# EAGLE board CT_schematic (EAGLE 7.6.0)

Size 100 x 80 mm. Coordinates in mm from the lower left corner, seen from the top.
Outline: 0,0 100,0 100,80 0,80 0,0
Copper layers (1*16): Top 0.035mm / dielectric 1.5mm / Bottom 0.035mm
Design rules "default": minimum track width 10mil, minimum drill 24mil, track to track 8mil, track to pad 8mil, pad to pad 8mil, via to via 8mil, smd to smd 8mil, copper to edge 40mil, drill to drill 8mil, minimum pad ring 10mil, minimum via ring 8mil, stop-mask expansion 4mil, vias tented up to drill 0mil, thermal gap 10mil

## Footprints (pad centres in the part's own frame; a part is rotated, then mirrored left to right if it is on the bottom)
C0603 = smd 0.8 x 0.8: 1 -0.762,0; 2 0.762,0
C0402 = smd 0.5 x 0.5: 1 -0.508,0; 2 0.508,0
C0805 = smd 1.2 x 1.3: 1 -1.016,0; 2 1.016,0
C1210 = smd 1.2 x 2.5: 1 -1.524,0; 2 1.524,0
2220 = smd 1.85 x 5.5: 1 -2.55,0; 2 2.55,0
R0603 = smd 0.8 x 0.8: 1 -0.762,0; 2 0.762,0
EXV-9H = smd 3.505 x 1.676: 1 -2.857,0; 2 2.857,0
L0603 = smd 0.8 x 0.8: 1 -0.762,0; 2 0.762,0
WE-HCI_7030/7040/7050 = smd 2.5 x 3: 1 -2.45,0; 2 2.45,0
PJ-037B_PACKAGE = drill 3.7 square: 1 12,0 | drill 3.2 square: 2 6,0
TFBGA100 = smd 0.4 x 0.4: A1 -3.6,3.6; A2 -2.8,3.6; A3 -2,3.6; A4 -1.2,3.6; A5 -0.4,3.6; A6 0.4,3.6; A7 1.2,3.6; A8 2,3.6; A9 2.8,3.6; A10 3.6,3.6; B1 -3.6,2.8; B2 -2.8,2.8; B3 -2,2.8; B4 -1.2,2.8; B5 -0.4,2.8; B6 0.4,2.8; B7 1.2,2.8; B8 2,2.8; B9 2.8,2.8; B10 3.6,2.8; C1 -3.6,2; C2 -2.8,2; C3 -2,2; C4 -1.2,2; C5 -0.4,2; C6 0.4,2; C7 1.2,2; C8 2,2; C9 2.8,2; C10 3.6,2; D1 -3.6,1.2; D2 -2.8,1.2; D3 -2,1.2; D4 -1.2,1.2; D5 -0.4,1.2; D6 0.4,1.2; D7 1.2,1.2; D8 2,1.2; D9 2.8,1.2; D10 3.6,1.2; E1 -3.6,0.4; E2 -2.8,0.4; E3 -2,0.4; E4 -1.2,0.4; E5 -0.4,0.4; E6 0.4,0.4; E7 1.2,0.4; E8 2,0.4; E9 2.8,0.4; E10 3.6,0.4; F1 -3.6,-0.4; F2 -2.8,-0.4; F3 -2,-0.4; F4 -1.2,-0.4; F5 -0.4,-0.4; F6 0.4,-0.4; F7 1.2,-0.4; F8 2,-0.4; F9 2.8,-0.4; F10 3.6,-0.4; G1 -3.6,-1.2; G2 -2.8,-1.2; G3 -2,-1.2; G4 -1.2,-1.2; G5 -0.4,-1.2; G6 0.4,-1.2; G7 1.2,-1.2; G8 2,-1.2; G9 2.8,-1.2; G10 3.6,-1.2; H1 -3.6,-2; H2 -2.8,-2; H3 -2,-2; H4 -1.2,-2; H5 -0.4,-2; H6 0.4,-2; H7 1.2,-2; H8 2,-2; H9 2.8,-2; H10 3.6,-2; J1 -3.6,-2.8; J2 -2.8,-2.8; J3 -2,-2.8; J4 -1.2,-2.8; J5 -0.4,-2.8; J6 0.4,-2.8; J7 1.2,-2.8; J8 2,-2.8; J9 2.8,-2.8; J10 3.6,-2.8; K1 -3.6,-3.6; K2 -2.8,-3.6; K3 -2,-3.6; K4 -1.2,-3.6; K5 -0.4,-3.6; K6 0.4,-3.6; K7 1.2,-3.6; K8 2,-3.6; K9 2.8,-3.6; K10 3.6,-3.6
SOT-23-6 = smd 1.1 x 0.6: 1 -1.4,0.95; 2 -1.4,0; 3 -1.4,-0.95; 4 1.4,-0.95; 5 1.4,0; 6 1.4,0.95
SAMTEC_FTSH-105-01-L-DV-K = smd 0.762 x 2.794: 1 -2.54,-2.032; 2 -2.54,2.032; 3 -1.27,-2.032; 4 -1.27,2.032; 5 0,-2.032; 6 0,2.032; 7 1.27,-2.032; 8 1.27,2.032; 9 2.54,-2.032; 10 2.54,2.032
SOIC-8 = smd 1.6 x 0.6: 1 -2.7,1.905 | smd 1.55 x 0.6: 2 -2.7,0.635; 3 -2.7,-0.635; 4 -2.7,-1.905; 5 2.7,-1.905; 6 2.7,-0.635; 7 2.7,0.635; 8 2.7,1.905
182-009-MALE = drill 1.194 pad 1.524 octagon: 1 -5.537,10.923; 2 -2.769,10.923; 3 0,10.923; 4 2.769,10.923; 5 5.537,10.923; 6 -4.153,8.08; 7 -1.384,8.08; 8 1.384,8.08; 9 4.153,8.08 | hole 3.048: -12.446,9.501; 12.446,9.501
MOLEX_47219-2001 = smd 0.8 x 1.5: 1 3.2,-2.1; 2 2.1,-2.1; 3 1,-2.1; 4 -0.1,-2.1; 5 -1.2,-2.1; 6 -2.3,-2.1; 7 -3.4,-2.1; 8 -4.5,-2.1 | smd 1.5 x 2.05: G1 6.875,-4.7; G2 6.875,3.6; G3 -6.875,3.6; G4 -6.875,-4.7
MICRO_USB_AB = smd 0.4 x 1.35: 1 1.3,0.26; 2 0.65,0.26; 3 0,0.26; 4 -0.65,0.26; 5 -1.3,0.26 | drill 0.6 pad 0.95 long: 6 4.175,-2.54; 7 -4.175,-2.54 | drill 0.7 pad 1.1 long: 8 -2.225,0.46; 9 2.225,0.46
SOT143B = smd 1 x 0.7: 1 -0.75,-1 | smd 0.6 x 0.7: 2 0.95,-1; 3 0.95,1; 4 -0.95,1
ABS07-32.768KHZ-7-T = smd 1.1 x 2.4: 1 -2.5,0; 2 0,0
ABLS-25.000MHZ-B2F-T = smd 5.6 x 2.8: 1 -3.81,0; 2 5.69,0
WSON-8 = smd 0.3 x 0.6: 1 -0.75,0; 2 0.05,0; 3 0.85,0; 4 1.65,0; 5 1.65,3.8; 6 0.85,3.8; 7 0.05,3.8; 8 -0.75,3.8 | smd 3 x 2.6: PAD 0.45,1.9
QFN-16_EP = smd 0.805 x 0.3: 1 -1.452,0.75; 2 -1.452,0.25; 3 -1.452,-0.25; 4 -1.452,-0.75; 9 1.452,-0.75; 10 1.452,-0.25; 11 1.452,0.25; 12 1.452,0.75 | smd 0.3 x 0.805: 5 -0.75,-1.452; 6 -0.25,-1.452; 7 0.25,-1.452; 8 0.75,-1.452; 13 0.75,1.452; 14 0.25,1.452; 15 -0.25,1.452; 16 -0.75,1.452 | smd 1.55 x 1.55: 17 0,0
QFN-38_UHF = smd 0.75 x 0.3: 1 -2.4,2.75; 2 -2.4,2.25; 3 -2.4,1.75; 4 -2.4,1.25; 6 -2.4,0.25; 7 -2.4,-0.25; 8 -2.4,-0.75; 9 -2.4,-1.25; 10 -2.4,-1.75; 11 -2.4,-2.25; 12 -2.4,-2.75; 20 2.4,-2.75; 21 2.4,-2.25; 22 2.4,-1.75; 23 2.4,-1.25; 24 2.4,-0.75; 25 2.4,-0.25; 26 2.4,0.25; 27 2.4,0.75; 28 2.4,1.25; 29 2.4,1.75; 30 2.4,2.25; 31 2.4,2.75 | smd 0.758 x 0.3: 5 -2.4,0.75 | smd 0.3 x 0.75: 13 -1.5,-3.4; 14 -1,-3.4; 15 -0.5,-3.4; 16 0,-3.4; 17 0.5,-3.4; 18 1,-3.4; 19 1.5,-3.4; 32 1.5,3.4; 33 1,3.4; 34 0.5,3.4; 35 0,3.4; 36 -0.5,3.4; 37 -1,3.4; 38 -1.5,3.4 | smd 3.2 x 5.2: 39 0,0
IRF8306MTRPBF = smd 0.9 x 1.85: 1 0,0; 2 0,-2.35; 6 6.4,0; 7 6.4,-2.35 | smd 0.75 x 0.75: 3 1.75,-1.175 | smd 1.45 x 0.87: 4 3.5,-0.565; 5 3.5,-1.785
SW_4-1437565-2 = smd 1.4 x 2.1: 1 -2.23,4.55; 2 -2.23,-4.55; 3 2.23,4.55; 4 2.23,-4.55
LGM67K-G1J2-24-Z = smd 0.8 x 1.4: A -2,0; C 0,0
NC7SZ125M5X = smd 1.3 x 0.7: 1 -1.3,0.95; 2 -1.3,0; 3 -1.3,-0.95; 4 1.3,-0.95; 5 1.3,0.95
DUMMY_PACKAGE_257 = drill 0.3: 1 0,-1; 2 1.5,-1; 3 3,-1

## Placement (x,y rotation side)
C1  1e-06  [C0603]  -62.23,88.9 0 top  (outside the outline)
C2  1e-07  [C0603]  -66.04,88.9 0 top  (outside the outline)
C3  1e-07  [C0603]  -69.85,88.9 0 top  (outside the outline)
C4  1e-07  [C0603]  -73.66,88.9 0 top  (outside the outline)
C5  1e-07  [C0603]  -77.47,88.9 0 top  (outside the outline)
C6  1e-07  [C0603]  -81.28,88.9 0 top  (outside the outline)
C7  4.7e-06  [C0603]  -54.61,88.9 0 top  (outside the outline)
C8  1e-08  [C0603]  -85.09,88.9 0 top  (outside the outline)
C9  1e-06  [C0603]  -88.9,88.9 0 top  (outside the outline)
C10  1e-07  [C0603]  -15.24,93.98 0 top  (outside the outline)
C11  1e-07  [C0603]  -19.05,93.98 0 top  (outside the outline)
C12  1e-07  [C0603]  -22.86,93.98 0 top  (outside the outline)
C13  1e-11  [C0402]  -15.24,99.06 0 top  (outside the outline)
C14  1e-11  [C0402]  -19.05,99.06 0 top  (outside the outline)
C15  1e-11  [C0402]  -22.86,99.06 0 top  (outside the outline)
C16  1e-11  [C0402]  -26.67,99.06 0 top  (outside the outline)
C17  1e-07  [C0402]  -30.48,99.06 0 top  (outside the outline)
C18  1e-08  [C0402]  -34.29,99.06 0 top  (outside the outline)
C19  1e-06  [C0603]  -26.67,93.98 0 top  (outside the outline)
C20  1e-06  [C0603]  -30.48,93.98 0 top  (outside the outline)
C21  1e-07  [C0402]  -38.1,99.06 0 top  (outside the outline)
C22  1e-05  [C0805]  -90.17,71.12 0 top  (outside the outline)
C23  1e-08  [C0402]  -41.91,99.06 0 top  (outside the outline)
C24  1e-05  [C1210]  -48.26,72.39 0 top  (outside the outline)
C25  1e-05  [C0805]  -15.24,78.74 0 top  (outside the outline)
C26  1e-05  [C0805]  -20.32,78.74 0 top  (outside the outline)
C27  1e-06  [C0603]  -34.29,93.98 0 top  (outside the outline)
C28  1e-07  [C0402]  -45.72,99.06 0 top  (outside the outline)
C29  6.8e-05  [2220]  -31.75,54.61 0 top  (outside the outline)
C30  1e-08  [C0402]  -49.53,99.06 0 top  (outside the outline)
C31  1e-05  [C1210]  -54.61,72.39 0 top  (outside the outline)
C32  1e-05  [C1210]  -60.96,72.39 0 top  (outside the outline)
C33  1e-08  [C0402]  -53.34,99.06 0 top  (outside the outline)
C34  1e-05  [C1210]  -67.31,72.39 0 top  (outside the outline)
C35  1e-05  [C0805]  -25.4,78.74 0 top  (outside the outline)
C36  1e-07  [C0402]  -57.15,99.06 0 top  (outside the outline)
C37  2.2e-06  [C0603]  -58.42,88.9 0 top  (outside the outline)
C38  2.45e-08  [R0603]  -20.32,83.82 0 top  (outside the outline)
C39  2.8258362168397e-09  [R0603]  -35.56,78.74 0 top  (outside the outline)
C40  7.105e-09  [R0603]  -40.64,78.74 0 top  (outside the outline)
C41  0.0001  [EXV-9H]  -46.99,63.5 0 top  (outside the outline)
C42  0.0001  [EXV-9H]  -58.42,63.5 0 top  (outside the outline)
C43  1e-08  [C0402]  -60.96,99.06 0 top  (outside the outline)
C44  1e-08  [C0402]  -64.77,99.06 0 top  (outside the outline)
F1  240.0  [L0603]  -38.1,93.98 0 top  (outside the outline)
I1  3.3e-06  [WE-HCI_7030/7040/7050]  -17.78,43.18 0 top  (outside the outline)
J1  PJ-037B  [PJ-037B_PACKAGE]  -73.66,29.21 0 top  (outside the outline)
R2  1000.0  [R0603]  -41.91,93.98 0 top  (outside the outline)
R7  4700.0  [R0603]  -45.72,93.98 0 top  (outside the outline)
R8  2200.0  [R0603]  -49.53,93.98 0 top  (outside the outline)
R10  2200.0  [R0603]  -53.34,93.98 0 top  (outside the outline)
R12  47000.0  [R0603]  -25.4,83.82 0 top  (outside the outline)
R13  10000.0  [R0603]  -30.48,83.82 0 top  (outside the outline)
R14  10000.0  [R0603]  -35.56,83.82 0 top  (outside the outline)
R15  10000.0  [R0603]  -40.64,83.82 0 top  (outside the outline)
R16  10000.0  [R0603]  -45.72,83.82 0 top  (outside the outline)
R17  10000.0  [R0603]  -50.8,83.82 0 top  (outside the outline)
R18  10000.0  [R0603]  -55.88,83.82 0 top  (outside the outline)
R19  10000.0  [R0603]  -60.96,83.82 0 top  (outside the outline)
R20  10000.0  [R0603]  -66.04,83.82 0 top  (outside the outline)
R21  10000.0  [R0603]  -71.12,83.82 0 top  (outside the outline)
R22  5.0  [R0603]  -57.15,93.98 0 top  (outside the outline)
R23  10000.0  [R0603]  -76.2,83.82 0 top  (outside the outline)
R24  120.0  [R0603]  -60.96,93.98 0 top  (outside the outline)
R25  100000.0  [R0603]  -45.72,78.74 0 top  (outside the outline)
R26  100000.0  [R0603]  -50.8,78.74 0 top  (outside the outline)
R27  100000.0  [R0603]  -55.88,78.74 0 top  (outside the outline)
R28  100000.0  [R0603]  -60.96,78.74 0 top  (outside the outline)
R29  100000.0  [R0603]  -66.04,78.74 0 top  (outside the outline)
R30  100000.0  [R0603]  -71.12,78.74 0 top  (outside the outline)
R31  100000.0  [R0603]  -76.2,78.74 0 top  (outside the outline)
R32  200.0  [R0603]  -64.77,93.98 0 top  (outside the outline)
R33  1000.0  [R0603]  -68.58,93.98 0 top  (outside the outline)
R34  20000.0  [R0603]  -81.28,83.82 0 top  (outside the outline)
R35  39000.0  [R0603]  -86.36,83.82 0 top  (outside the outline)
R36  300000.0  [R0603]  -81.28,78.74 0 top  (outside the outline)
R37  100000.0  [R0603]  -86.36,78.74 0 top  (outside the outline)
R38  3900.0  [R0603]  -72.39,93.98 0 top  (outside the outline)
R39  1000.0  [R0603]  -76.2,93.98 0 top  (outside the outline)
R40  100000.0  [R0603]  -91.44,78.74 0 top  (outside the outline)
R41  200.0  [R0603]  -80.01,93.98 0 top  (outside the outline)
R42  1000.0  [R0603]  -83.82,93.98 0 top  (outside the outline)
R43  10000.0  [R0603]  -91.44,83.82 0 top  (outside the outline)
R44  75000.0  [R0603]  -15.24,88.9 0 top  (outside the outline)
R45  10000.0  [R0603]  -20.32,88.9 0 top  (outside the outline)
R46  10000.0  [R0603]  -25.4,88.9 0 top  (outside the outline)
R47  95300.0  [R0603]  -30.48,88.9 0 top  (outside the outline)
R48  95300.0  [R0603]  -35.56,88.9 0 top  (outside the outline)
R49  10000.0  [R0603]  -40.64,88.9 0 top  (outside the outline)
R50  10000.0  [R0603]  -45.72,88.9 0 top  (outside the outline)
R51  10000.0  [R0603]  -50.8,88.9 0 top  (outside the outline)
R52  100000.0  [R0603]  -15.24,83.82 0 top  (outside the outline)
U1  STM32F745VEH6  [TFBGA100]  -53.34,29.21 0 top  (outside the outline)
U2  MAX4995AAUT+T  [SOT-23-6]  -72.39,71.12 0 top  (outside the outline)
U3  FTSH-105-01-L-DV-K  [SAMTEC_FTSH-105-01-L-DV-K]  -35.56,30.48 0 top  (outside the outline)
U4  M24M02-DRMN6TP  [SOIC-8]  -53.34,41.91 0 top  (outside the outline)
U5  MCP2562-E/SN  [SOIC-8]  -67.31,41.91 0 top  (outside the outline)
U6  182-009-113R531  [182-009-MALE]  -36.83,6.35 0 top  (outside the outline)
U7  0472192001  [MOLEX_47219-2001]  -62.23,8.89 0 top  (outside the outline)
U8  47590-0001  [MICRO_USB_AB]  -82.55,30.48 0 top  (outside the outline)
U9  prtr5v0u2ax  [SOT143B]  -77.47,99.06 0 top  (outside the outline)
U10  ABS07-32.768KHZ-7-T  [ABS07-32.768KHZ-7-T]  -27.94,72.39 0 top  (outside the outline)
U11  ABLS-25.000MHZ-B2F-T  [ABLS-25.000MHZ-B2F-T]  -77.47,63.5 0 top  (outside the outline)
U12  LP3878SDX-ADJ/NOPB  [WSON-8]  -53.34,52.07 0 top  (outside the outline)
U13  LTC3601EUD#PBF  [QFN-16_EP]  -88.9,93.98 0 top  (outside the outline)
U14  LP3878SDX-ADJ/NOPB  [WSON-8]  -73.66,52.07 0 top  (outside the outline)
U15  LP3878SDX-ADJ/NOPB  [WSON-8]  -30.48,62.23 0 top  (outside the outline)
U16  LTC2928CUHF#PBF  [QFN-38_UHF]  -36.83,63.5 0 top  (outside the outline)
U17  IRF8306MTRPbF  [IRF8306MTRPBF]  -85.09,43.18 0 top  (outside the outline)
U18  IRF8306MTRPbF  [IRF8306MTRPBF]  -26.67,54.61 0 top  (outside the outline)
U19  4-1437565-2  [SW_4-1437565-2]  -36.83,43.18 0 top  (outside the outline)
U20  Q65110A2395  [LGM67K-G1J2-24-Z]  -36.83,72.39 0 top  (outside the outline)
U21  nc7sz125m5x  [NC7SZ125M5X]  -77.47,71.12 0 top  (outside the outline)
U22  nc7sz125m5x  [NC7SZ125M5X]  -83.82,71.12 0 top  (outside the outline)
U23  Dummy  [DUMMY_PACKAGE_257]  -83.82,99.06 0 top  (outside the outline)

## Library data of the parts
C1-C44 F1 I1 J1 R2 R7 R8 R10 R12-R52 U1-U23 = circuit_tree

## Nets
CLK_CRYSTAL_U1_A1: C13.1 U1.A1 U10.1
CLK_CRYSTAL_U1_B1: C14.1 U1.B1 U10.2
CLK_CRYSTAL_U1_C1: C15.1 U1.C1 U11.1
CLK_CRYSTAL_U1_D1: C16.1 U1.D1 U11.2
GND: C1.2 C2.2 C3.2 C4.2 C5.2 C6.2 C7.2 C8.2 C9.2 C10.2 C11.2 C12.2 C13.2 C14.2 C15.2 C16.2 C17.2 C18.2 C19.2 C20.2 C21.2 C22.2 C23.2 C24.2 C25.2 C26.2 C27.2 C29.1 C29.2 C30.2 C31.2 C32.2 C33.2 C34.2 C35.2 C36.2 C37.2 C38.2 C39.2 C40.2 C41.2 C42.2 C43.2 C44.2 J1.2 R2.2 R12.2 R13.2 R17.2 R21.2 R22.2 R23.2 R33.2 R34.2 R36.2 R39.2 R42.2 R44.2 R47.2 R48.2 R49.2 R50.2 R51.2 U1.C2 U1.E4 U1.E5 U1.G1 U1.J1 U2.2 U3.3 U3.5 U4.4 U5.2 U5.8 U6.5 U7.6 U7.G1 U7.G2 U7.G3 U7.G4 U8.5 U8.6 U8.7 U8.8 U8.9 U9.1 U12.3 U12.PAD U13.1 U13.9 U13.17 U14.3 U14.PAD U15.3 U15.PAD U16.8 U16.9 U16.10 U16.12 U16.13 U16.24 U16.25 U16.30 U16.32 U16.39 U20.C U21.2 U21.3 U22.1 U22.3 U23.1
NET_U1_A5: R10.1 U1.A5 U4.5
NET_U1_B4: R8.1 U1.B4 U4.6
NET_U1_D5: R13.1 U1.D5
NET_U1_E1: R7.1 U1.E1 U22.4
NET_U1_E6: R15.1 U1.E6
NET_U1_E7: C12.1 U1.E7
NET_U1_F7: R14.1 U1.F7
NET_U1_H1: C8.1 C9.1 F1.1 U1.H1
NET_U1_K9: U20.A
NET_U1_K10: U19.3 U19.4
NET_U2_3: R12.1 U2.3
NET_U3_9: R22.1 U3.9
NET_U4_3: R23.1 U4.3
NET_U5_6: R24.2 U5.6
NET_U6_2: R24.2 U5.6 U6.2
NET_U6_3: R24.1 U5.7 U6.3
NET_U12_1: C23.1 U12.1
NET_U12_6: R32.2 R33.1 U12.6
NET_U12_8: R31.1 U12.8
NET_U13_3: C28.2 I1.1 U13.3 U13.4
NET_U13_6: C28.1 U13.6
NET_U13_7: C27.1 U13.7 U13.12
NET_U13_10: R36.1 U13.10
NET_U13_11: R34.1 R35.1 U13.11
NET_U13_14: U13.14
NET_U13_ATNET_3: I1.2 R35.2
NET_U14_1: C30.1 U14.1
NET_U14_6: R38.2 R39.1 U14.6
NET_U14_8: R37.1 U14.8
NET_U15_1: C33.1 U15.1
NET_U15_6: R41.2 R42.1 U15.6
NET_U15_8: R40.1 U15.8
NET_U16_3: R50.1 U16.3
NET_U16_6: R47.1 U16.6
NET_U16_7: R48.1 U16.7
NET_U16_16: R49.1 R52.1 U16.16
NET_U16_18: R46.1 U16.18
NET_U16_19: R45.1 U16.19 U16.20
NET_U16_21: R43.1 R44.1 U16.21 U21.4 U22.2
NET_U16_22: C36.1 R43.2 R45.2 R46.2 U16.11 U16.22
NET_U16_26: C39.1 U16.26
NET_U16_27: C38.1 U16.27
NET_U16_28: C40.1 U16.28
NET_U16_38: R51.1 U16.38
NET_U17_3: U16.2 U17.3
NET_U18_3: U16.37 U18.3
NET_U19_1: R2.1 U19.1 U19.2
PROC_CAN1_RX: U1.D8 U5.4
PROC_CAN1_TX: U1.A4 U5.1
PROC_GPIO_TO_U1_USB_FAULT: R16.1 U1.A3 U2.6
PROC_GPIO_TO_U1_VBUS_EN: R17.1 U1.A2 U2.4
PROC_SDMMC1_CK: R26.1 U1.C8 U7.5
PROC_SDMMC1_CMD: R25.1 U1.B7 U7.3
PROC_SDMMC1_D0: R27.1 U1.F9 U7.7
PROC_SDMMC1_D1: R28.1 U1.E9 U7.8
PROC_SDMMC1_D2: R29.1 U1.B9 U7.1
PROC_SDMMC1_D3: R30.1 U1.B8 U7.2
PROC_SYS_JTCK_SWCLK: R21.1 U1.A9 U3.4
PROC_SYS_JTDI: R19.1 U1.A8 U3.8
PROC_SYS_JTDO_SWO: U1.A7 U3.6
PROC_SYS_JTMS_SWDIO: R20.1 U1.A10 U3.2
PROC_TIM1_CH1: U1.D9 U23.2
PROC_TIM1_CH2N: U1.G6 U23.3
PROC_USB_OTG_FS_DM: U1.C10 U8.2 U9.3
PROC_USB_OTG_FS_DP: U1.B10 U8.3 U9.2
PROC_USB_OTG_FS_ID: U1.D10 U8.4
PROC_USB_OTG_FS_VBUS: U1.C9 U2.1 U8.1 U9.4
RST_OUT_U3_JTAG_RST_B: R18.1 U3.10 U21.1
VCC_12V0: C37.1 C41.1 C42.1 J1.1 R52.2 U16.23 U17.1 U17.2 U17.6 U17.7 U18.1 U18.2 U18.6 U18.7
VCC_S1_12V0: C24.1 C26.1 C31.1 R31.2 R37.2 U12.4 U13.15 U13.16 U14.4 U17.4 U17.5
VCC_S2_12V0: C34.1 R40.2 U15.4 U18.4 U18.5
VCC_TIER1_1V2: C11.1 C25.1 R32.1 U1.F8 U12.5
VCC_TIER1_1V8: C1.1 C2.1 C3.1 C4.1 C5.1 C6.1 C7.1 C10.1 C17.1 C18.1 C20.1 C21.1 C22.1 C29.2 C43.1 C44.1 F1.2 I1.2 R7.2 R8.2 R10.2 R14.2 R15.2 R16.2 R18.2 R19.2 R20.2 R25.2 R26.2 R27.2 R28.2 R29.2 R30.2 R35.2 U1.B2 U1.D2 U1.F4 U1.F5 U1.F6 U1.K1 U3.1 U4.8 U5.5 U7.4 U13.8 U21.5 U22.5
VCC_TIER1_5V0: C19.1 C32.1 R38.1 U2.5 U5.3 U14.5
VCC_TIER2_1V2: C35.1 R41.1 U15.5

## Tracks (layer width: path | path; a pad name or v marks a point on that pad's centre or on a via)
CLK_CRYSTAL_U1_A1  (2 unrouted)
CLK_CRYSTAL_U1_B1  (2 unrouted)
CLK_CRYSTAL_U1_C1  (2 unrouted)
CLK_CRYSTAL_U1_D1  (2 unrouted)
GND  (110 unrouted)
NET_U1_A5  (2 unrouted)
NET_U1_B4  (2 unrouted)
NET_U1_D5  (1 unrouted)
NET_U1_E1  (2 unrouted)
NET_U1_E6  (1 unrouted)
NET_U1_E7  (1 unrouted)
NET_U1_F7  (1 unrouted)
NET_U1_H1  (3 unrouted)
NET_U1_K10  (1 unrouted)
NET_U2_3  (1 unrouted)
NET_U3_9  (1 unrouted)
NET_U4_3  (1 unrouted)
NET_U5_6  (1 unrouted)
NET_U6_2  (2 unrouted)
NET_U6_3  (2 unrouted)
NET_U12_1  (1 unrouted)
NET_U12_6  (2 unrouted)
NET_U12_8  (1 unrouted)
NET_U13_3  (3 unrouted)
NET_U13_6  (1 unrouted)
NET_U13_7  (2 unrouted)
NET_U13_10  (1 unrouted)
NET_U13_11  (2 unrouted)
NET_U13_ATNET_3  (1 unrouted)
NET_U14_1  (1 unrouted)
NET_U14_6  (2 unrouted)
NET_U14_8  (1 unrouted)
NET_U15_1  (1 unrouted)
NET_U15_6  (2 unrouted)
NET_U15_8  (1 unrouted)
NET_U16_3  (1 unrouted)
NET_U16_6  (1 unrouted)
NET_U16_7  (1 unrouted)
NET_U16_16  (2 unrouted)
NET_U16_18  (1 unrouted)
NET_U16_19  (2 unrouted)
NET_U16_21  (4 unrouted)
NET_U16_22  (5 unrouted)
NET_U16_26  (1 unrouted)
NET_U16_27  (1 unrouted)
NET_U16_28  (1 unrouted)
NET_U16_38  (1 unrouted)
NET_U17_3  (1 unrouted)
NET_U18_3  (1 unrouted)
NET_U19_1  (2 unrouted)
PROC_CAN1_RX  (1 unrouted)
PROC_CAN1_TX  (1 unrouted)
PROC_GPIO_TO_U1_USB_FAULT  (2 unrouted)
PROC_GPIO_TO_U1_VBUS_EN  (2 unrouted)
PROC_SDMMC1_CK  (2 unrouted)
PROC_SDMMC1_CMD  (2 unrouted)
PROC_SDMMC1_D0  (2 unrouted)
PROC_SDMMC1_D1  (2 unrouted)
PROC_SDMMC1_D2  (2 unrouted)
PROC_SDMMC1_D3  (2 unrouted)
PROC_SYS_JTCK_SWCLK  (2 unrouted)
PROC_SYS_JTDI  (2 unrouted)
PROC_SYS_JTDO_SWO  (1 unrouted)
PROC_SYS_JTMS_SWDIO  (2 unrouted)
PROC_TIM1_CH1  (1 unrouted)
PROC_TIM1_CH2N  (1 unrouted)
PROC_USB_OTG_FS_DM  (2 unrouted)
PROC_USB_OTG_FS_DP  (2 unrouted)
PROC_USB_OTG_FS_ID  (1 unrouted)
PROC_USB_OTG_FS_VBUS  (3 unrouted)
RST_OUT_U3_JTAG_RST_B  (2 unrouted)
VCC_12V0  (13 unrouted)
VCC_S1_12V0  (10 unrouted)
VCC_S2_12V0  (4 unrouted)
VCC_TIER1_1V2  (4 unrouted)
VCC_TIER1_1V8  (46 unrouted)
VCC_TIER1_5V0  (5 unrouted)
VCC_TIER2_1V2  (2 unrouted)